# Altium PCB BoomClock.PcbDoc
Units mil, origin at the board's own origin, x right, y up, seen from the top; angles counter-clockwise.
Board outline 3917.32 x 3031.5 mil, 2 copper layers (Top Layer, Bottom Layer); 36 components, 55 nets, 205 pads, 32 vias.
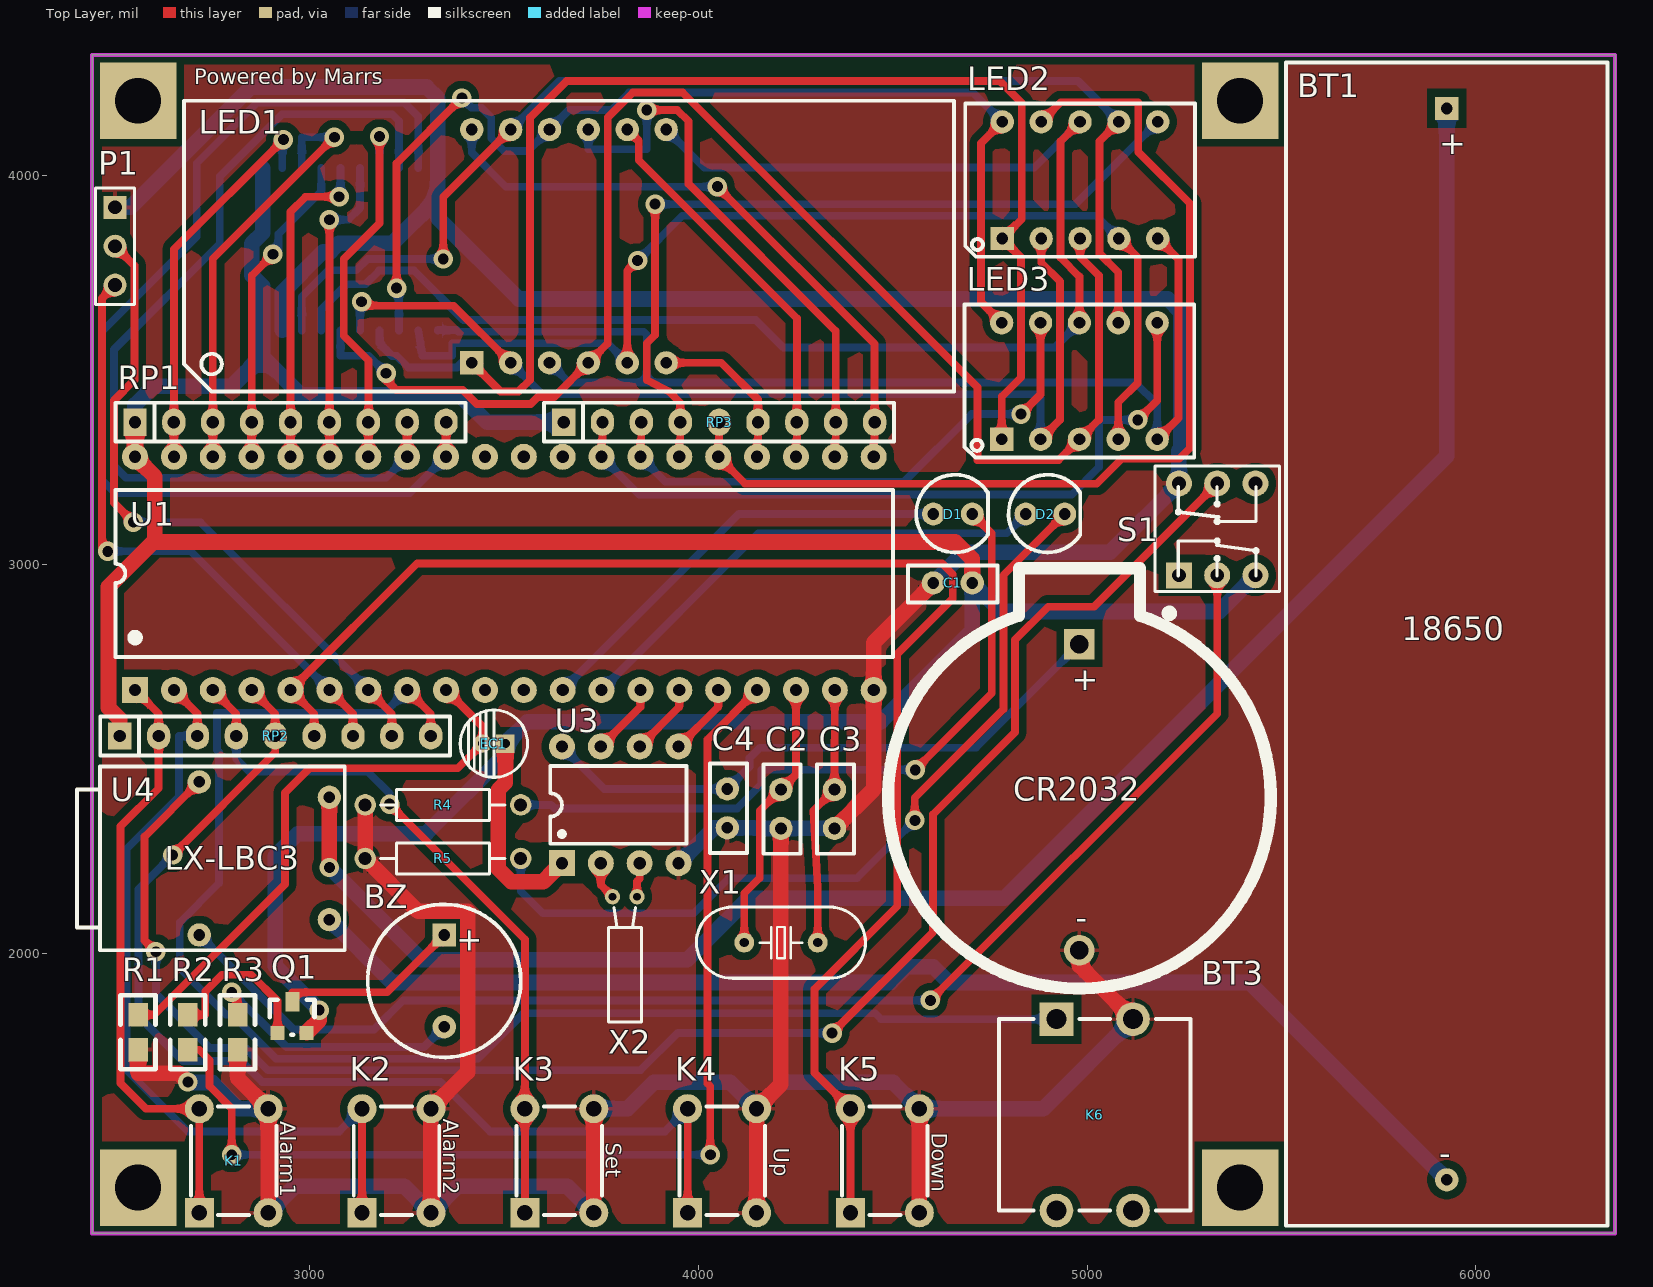
[diagram p0: Top Layer view]
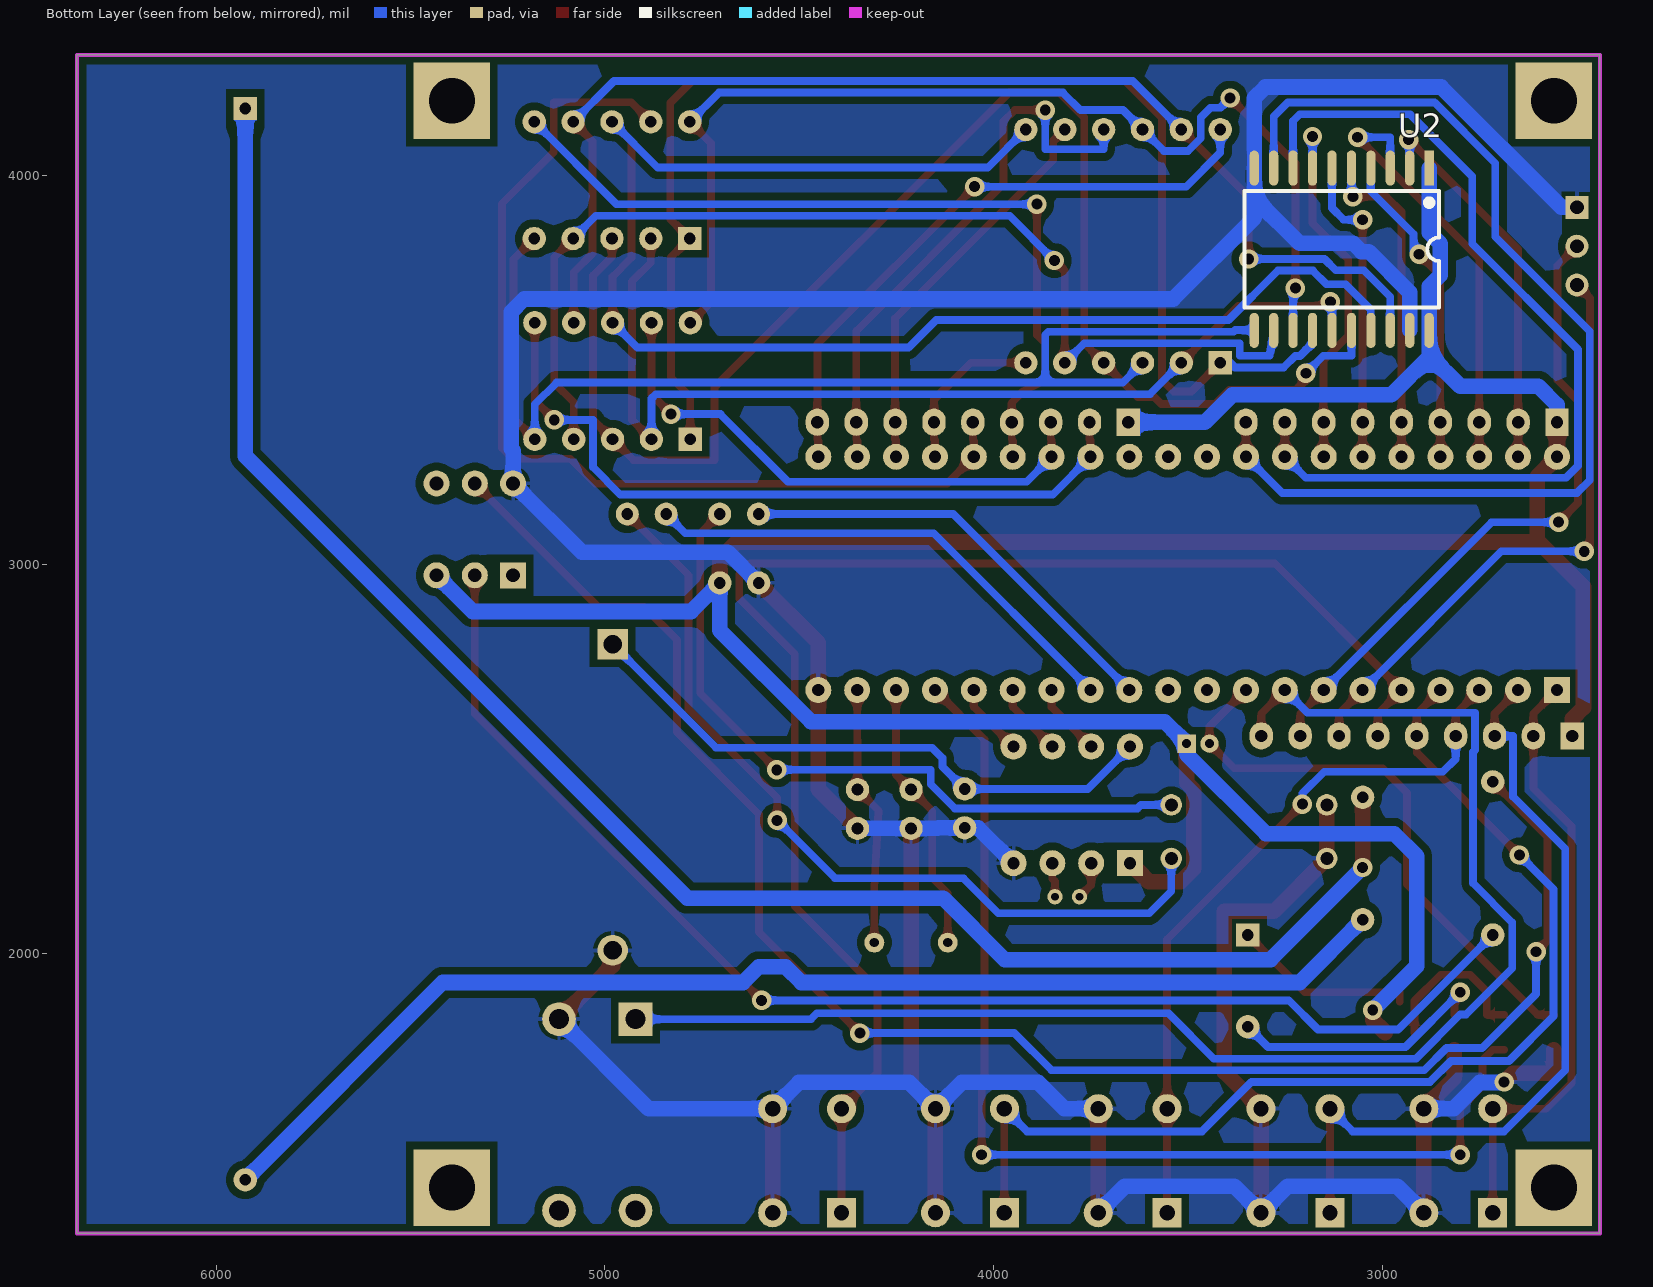
[diagram p1: Bottom Layer view, seen from below]
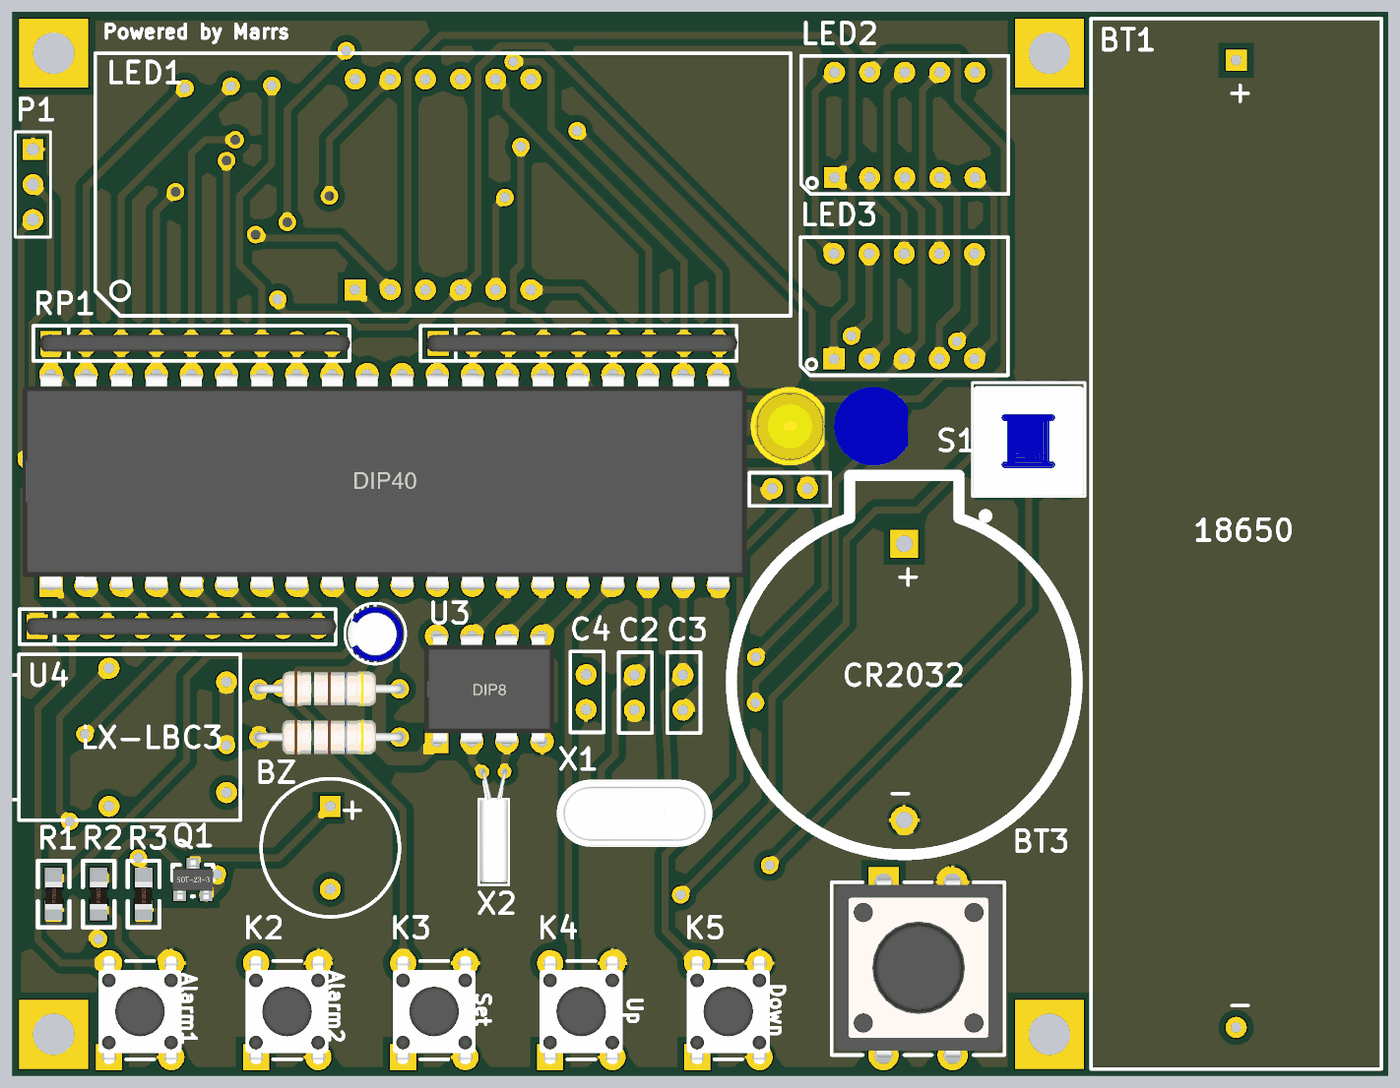
[diagram p2: 3D render of the assembled board from above, using the file's embedded part models]

## Layer stack, top to bottom
Top Solder: solder mask 0.4, Solder Resist, Dk 3.5
Top Layer: signal copper 1.4
Dielectric 1: dielectric 12.6, FR-4, Dk 4.8
Bottom Layer: signal copper 1.4
Bottom Solder: solder mask 0.4, Solder Resist, Dk 3.5

## Board outline
2440.94,1279.53 2440.94,4311.02 6358.27,4311.02 6358.27,1279.53

## Design rules (kind name [scope] priority, off if disabled: settings)
Clearance Clearance_Polygon_Pour [InPolygon] p1: gap=20 ignorepadtopadclearanceinfootprint=FALSE
Clearance [All] p2: gap=10 ignorepadtopadclearanceinfootprint=FALSE
PolygonConnect [All] p1: connectstyle=Relief reliefconductorwidth=10 reliefentries=4 polygonreliefangle="90 Angle" airgapwidth=10
RoutingVias [All] p1: holewidth=28 width=50 viastyle="Through Hole" minholewidth=28 minwidth=50 maxholewidth=28 maxwidth=50
SolderMaskExpansion [All] p1: expansion=4 istentingtop=FALSE
SupplyNets "Schematic Supply Nets_1" [InNet('GND')] p1: voltage=0.000
SupplyNets "Schematic Supply Nets" [InNet('VCC')] p2: voltage=0.000
Width Width_NetS1_6 [InNet('NetS1_6')] p1: maxlimit=80 minlimit=30 preferedwidth=40 minimp=50.000000 maximp=50.000000 favimp=50.000000
Width Width_NetS1_1 [InNet('NetS1_1')] p2: maxlimit=80 minlimit=30 preferedwidth=40 minimp=50.000000 maximp=50.000000 favimp=50.000000
Width Width_NETBT12 [InNet('NetBT1_2')] p3: maxlimit=80 minlimit=30 preferedwidth=40 minimp=50.000000 maximp=50.000000 favimp=50.000000
Width Width_NETBT11 [InNet('NetBT1_1')] p4: maxlimit=80 minlimit=30 preferedwidth=40 minimp=50.000000 maximp=50.000000 favimp=50.000000
Width Width_GND [InNet('GND')] p5: maxlimit=80 minlimit=30 preferedwidth=40 minimp=50.000000 maximp=50.000000 favimp=50.000000
Width Width_VCC [InNet('VCC')] p6: maxlimit=80 minlimit=30 preferedwidth=40 minimp=50.000000 maximp=50.000000 favimp=50.000000
Width [All] p7: maxlimit=40 minlimit=20 preferedwidth=20 minimp=50.000000 maximp=50.000000 favimp=50.000000
30 further rules are at their usual default settings.

## Components (designator, comment, footprint, x,y, rotation, side; value= is the part's Value field where it differs from the comment)
BT1 "18650" Battery_18650 5511.81,4291.34 r0 top
BT3 "Battery" Battery_CR2032 4980.31,2795.28 r270 top
BZ "Beep" Beep 3346.46,1929.13 r270 top
C1 "104" RAD-0.1 4539.72,2997.76 r0 top
C2 "33p" RAD-0.1 4167.6,2256.26 r90 top
C3 "33p" RAD-0.1 4305.39,2256.26 r90 top
C4 "104" RAD-0.1 4029.8,2257.83 r90 top
D1 "LED" LED5-YEL 4604.72,3129.92 r0 top
D2 "LED" LED5-BLUE 4842.52,3129.92 r0 top
EC1 "10uf" DIP-EC1.5X4X8 3503.94,2539.37 r180 top
K1 "Alarm1" DIP-6X6X5 2716.54,1332.68 r90 top
K2 "Alarm2" DIP-6X6X5 3135.23,1332.68 r90 top
K3 "Set" DIP-6X6X5 3553.93,1332.68 r90 top
K4 "Up" DIP-6X6X5 3972.63,1332.68 r90 top
K5 "Down" DIP-6X6X5 4391.33,1332.68 r90 top
K6 "Boom" DIP-12X12X8 4921.26,1830.71 r0 top
LED1 "Digital_4_time" Digital_4_time 2677.17,4192.91 r0 top
LED2 "Digital_2" Digital_2 4686.61,4185.43 r0 top
LED3 "Digital_2" Digital_2 4685.04,3668.9 r0 top
P1 "Header 3" HDR1X3 2500,3918.9 r270 top
Q1 "PNP" SOT-23 2952.76,1830.71 r0 top
R1 "10k" 0805R 2559.06,1751.97 r90 top
R2 "100" 0805R 2687.01,1751.97 r90 top
R3 "100" 0805R 2814.96,1751.97 r90 top
R4 "470" AXIAL0.4 3673.31,2421.89 r180 top
R5 "470" AXIAL0.4 3673.31,2284.09 r180 top
RP1 "RES_PACK9" A09R 2551.18,3366.14 r90 top
RP2 "RES_PACK9" A09R 2511.81,2559.06 r90 top
RP3 "RES_PACK9" A09R 3653.54,3366.14 r90 top
S1 "KFT DIP-8X8" "KFT DIP-8X8" 5236.22,2972.44 r90 top
U1 "STC89C51RC" DIP40 3501.18,2977.17 r90 top
U2 "74HC245D" SOP20 2879.92,4019.68 r270 bottom
U3 "DS1302" DIP8 3799.21,2381.89 r90 top
U4 "LX-LBC3" LX-LBC3 2460.63,2007.87 r90 top
X1 "XTAL-2P" "OSC HC-49S" 4212.6,2027.56 r180 top
X2 "32.768" OSC-2x6-WI-A 3842.52,2145.67 r180 top

## Footprints (in the part's own frame and the unit in brackets; to place one, negate y for a bottom-side part, rotate by r counter-clockwise, add the part's x,y. Pads: shape width x height; smd on the part's side, far side on the other; paste and mask are expansions set on the pad)
0805R [mil]
  rect 60x50 smd: 1(0,0) 2(90,0)
  silkscreen extent -50,-45 140,45, body extent 1,-25 80,25, height 15
A09R [mil]
  rect 70x60 hole 32: 1(0,0)
  oval 70x60 hole 32: 2(0,-100) 3(0,-200) 4(0,-300) 5(0,-400) 6(0,-500) 7(0,-600) 8(0,-700) 9(0,-800)
  silkscreen extent -50,-850 50,50, body extent -24,-853 25,33, height 169
AXIAL0.4 [mm] "1/4W/1/2W"
  round 1.4 hole 0.85: 1(3.302,1.016) 2(13.462,1.016)
  silkscreen extent 4.32,0 12.45,2.03, body extent 3,-0.24 13.76,2.28, height 2.63
Battery_18650 [mil]
  rect 60x60 hole 30: 1(413.38,-118.11)
  round 60 hole 30: 2(413.38,-2874.02)
  silkscreen extent 0,-2992 827,0
Battery_CR2032 [mm]
  rect 2x2 hole 1.2: 1(0,0)
  round 2 hole 1.2: 2(20,0)
  silkscreen extent -4.95,-12.5 22.5,12.5, body extent -4.95,-13 23,13, height 1.27
Beep [mil]
  rect 60x60 hole 30: 1(-118.11,0)
  round 60 hole 30: 2(118.11,0)
  silkscreen extent -197,-197 197,197
Digital_2 [mil]
  rect 60x60 hole 30: 1(95.28,-346.85)
  round 60 hole 30: 2(195.28,-346.85) 3(295.28,-346.85) 4(395.28,-346.85) 5(495.28,-346.85) 6(495.28,-46.85) 7(395.28,-46.85) 8(295.28,-46.85) 9(195.28,-46.85) 10(95.28,-46.85)
  silkscreen extent 0,-394 591,0
Digital_4_time [mil]
  rect 60x60 hole 30: 1(740.16,-674.02)
  round 60 hole 30: 2(840.16,-674.02) 3(940.16,-674.02) 4(1040.16,-674.02) 5(1140.16,-674.02) 6(1240.16,-674.02) 7(1240.16,-74.02) 8(1140.16,-74.02) 9(1040.16,-74.02) 10(940.16,-74.02) 11(840.16,-74.02) 12(740.16,-74.02)
  silkscreen extent 0,-748 1980,0
DIP8 [mm]
  rect 1.7x1.7 hole 0.8: 1(-3.81,3.81)
  round 1.7 hole 0.8: 2(-3.81,1.27) 3(-3.81,-1.27) 4(-3.81,-3.81) 5(3.81,-3.81) 6(3.81,-1.27) 7(3.81,1.27) 8(3.81,3.81)
  silkscreen extent -2.54,-4.32 2.54,4.57, body extent -3.94,-4.7 3.91,4.7, height 4.5
DIP40 [mm]
  rect 1.7x1.7 hole 0.8: 1(-7.62,24.13)
  round 1.7 hole 0.8: 2(-7.62,21.59) 3(-7.62,19.05) 4(-7.62,16.51) 5(-7.62,13.97) 6(-7.62,11.43) 7(-7.62,8.89) 8(-7.62,6.35) 9(-7.62,3.81) 10(-7.62,1.27) 11(-7.62,-1.27) 12(-7.62,-3.81) 13(-7.62,-6.35) 14(-7.62,-8.89) 15(-7.62,-11.43) 16(-7.62,-13.97) 17(-7.62,-16.51) 18(-7.62,-19.05) 19(-7.62,-21.59) 20(-7.62,-24.13) 21(7.62,-24.13) 22(7.62,-21.59) 23(7.62,-19.05) 24(7.62,-16.51) 25(7.62,-13.97) 26(7.62,-11.43) 27(7.62,-8.89) 28(7.62,-6.35) 29(7.62,-3.81) 30(7.62,-1.27) 31(7.62,1.27) 32(7.62,3.81) 33(7.62,6.35) 34(7.62,8.89) 35(7.62,11.43) 36(7.62,13.97) 37(7.62,16.51) 38(7.62,19.05) 39(7.62,21.59) 40(7.62,24.13)
  silkscreen extent -5.46,-25.4 5.46,25.4, body extent -7.91,-26.19 7.65,26.16, height 4.7
DIP-6X6X5 [mm]
  rect 1.9x1.9 hole 1: 1(0,0)
  round 1.9 hole 1: 2(0,-4.5) 3(6.8,-4.5) 4(6.8,0)
  silkscreen extent -0.16,-5.04 6.96,0.54, body extent -0.8,-5.24 7.41,0.76, height 4.95
DIP-12X12X8 [mm]
  rect 2.2x2.2 hole 1.3: 1(0,0)
  round 2.2 hole 1.3: 2(5,0) 3(0,-12.5) 4(5,-12.5)
  silkscreen extent -3.75,-12.5 8.75,0, body extent -3.46,-13.08 8.54,0.72, height 8.15
DIP-EC1.5X4X8 [mm]
  rect 1.2x1.2 hole 0.6: 1(0,0)
  round 1.2 hole 0.6: 2(1.5,0)
  silkscreen extent -1.45,-2.2 2.95,2.2, body extent -1.26,-1.97 2.76,2.03, height 8.04
HDR1X3 [mm] "Connector; Header; 3 Position"
  rect 1.5x1.5 hole 0.9: 1(0,0)
  round 1.5 hole 0.9: 2(2.54,0) 3(5.08,0)
  silkscreen extent -1.27,-1.27 6.35,1.27
"KFT DIP-8X8" [mm]
  rect 1.7x1.7 hole 0.9: 1(0,0)
  round 1.7 hole 0.9: 2(0,-2.5) 3(0,-5) 4(6,0) 5(6,-2.5) 6(6,-5)
  silkscreen extent -2.69,-6.56 7.15,1.56, body extent -1.08,-6.48 6.92,1.52, height 13.1
LED5-BLUE [mm]
  round 1.5 hole 0.762: A(0,0) K(2.54,0)
  silkscreen extent -1.12,-2.51 3.56,2.57, body extent -1.58,-2.85 3.77,2.85, height 8.6
LED5-YEL [mm]
  round 1.5 hole 0.762: A(0,0) K(2.54,0)
  silkscreen extent -1.12,-2.51 3.56,2.57, body extent -1.58,-2.85 3.77,2.85, height 8.6
LX-LBC3 [mil]
  round 60 hole 30: 1(39.37,-255.91) 2(433.07,-255.91) 3(393.7,-590.55) 4(78.74,-590.55)
  silkscreen extent 0,-630 472,59
"OSC HC-49S" [mm]
  round 1.3 hole 0.6: 1(-2.4,0) 2(2.4,0)
  silkscreen extent -5.52,-2.32 5.52,2.33, body extent -5.53,-2.29 5.53,2.36, height 4.13
OSC-2x6-WI-A [mm]
  round 1 hole 0.5: 1(0,0) 2(1.6,0)
  silkscreen extent -0.3,0.7 1.87,8.2, body extent -0.25,-0.14 1.75,8.02, height 2.05
RAD-0.1 [mil]
  round 60 hole 30: 1(65,-45) 2(165,-45)
  silkscreen extent 0,-95 230,0
SOP20 [mm]
  rect 2.3x0.6 smd: 1(0,0)
  oval 2.3x0.6 smd: 2(0,-1.27) 3(0,-2.54) 4(0,-3.81) 5(0,-5.08) 6(0,-6.35) 7(0,-7.62) 8(0,-8.89) 9(0,-10.16) 10(0,-11.43) 11(10.6,-11.43) 12(10.6,-10.16) 13(10.6,-8.89) 14(10.6,-7.62) 15(10.6,-6.35) 16(10.6,-5.08) 17(10.6,-3.81) 18(10.6,-2.54) 19(10.6,-1.27) 20(10.6,0)
  silkscreen extent 1.49,-12.07 9.11,0.63, body extent 0.13,-12.07 10.44,0.63, height 2.7
SOT-23 [mil]
  rect 36x36 smd: B(-35,-35) E(40,-35)
  rect 36x50 smd: C(3,45)
  silkscreen extent -55,-40 60,50, body extent -54,-48 60,62, height 47

## Part data
BT1: library part Battery, "电池"
BT3: "电池"
BZ: "蜂鸣器"
C1 C2 C3 C4: library part CAP, "无极性电容"
EC1: library part DIP_ECAP, "直插电解电容"
K1 K2 K3 K4 K5 K6: library part KEY, "按动开关"
LED1: "四位时间数码管"
LED2 LED3: "二位数码管"
P1: "Header, 3-Pin", LatestRevisionDate=17-Jul-2002, LatestRevisionNote="Re-released for DXP Platform.", Publisher="Altium Limited"
Q1: "PNP三极管"
R1 R2 R3 R4 R5: library part RES, "电阻"
RP1 RP2 RP3: "排阻"
U4: "电源模块"
X1: "2脚无源脚晶振"
X2: library part XTAL-2P, "2脚无源脚晶振"

## Free pads (board coordinates)
  rect 196.85x196.85 hole 118.11: 1(2559.06,1397.64) 2(5393.7,1397.64) 3(5393.7,4192.91) 4(2559.06,4192.91)

## Via types
v1: diameter 50, hole 28, Top Layer to Bottom Layer, 32 vias

## Nets (pads, with @x,y where several pads share a name; then routed paths per layer and width w, separated by ;. In a path a pad name is that pad's centre, name@x,y a point inside that pad or via, vN(x,y) a via of type N, cw(c..) or ccw(c..) an arc to the next point about the centre after c; other vN are vias at no path point)
A0: RP1.2 U1.39 U2.2 | length 1007.2
  Top Layer w20: U1.39 RP1.2 2651.18,3811.18 v1(2933,4093)
  Bottom Layer w20: U2.2 2929.92,4089.92 v1(2933,4093)
A1: RP1.3 U1.38 U2.3 | length 1114.8
  Top Layer w20: U1.38 RP1.3 2751.18,3786.18 v1(3064,4099)
  Bottom Layer w20: U2.3 2979.92,4099 v1(3064,4099)
A2: RP1.4 U1.37 U2.4 | length 816.6
  Top Layer w20: U1.37 RP1.4 2851.18,3743.18 v1(2906,3798)
  Bottom Layer w20: v1(2906,3798) 2920,3812 2920,3850 3029.92,3959.92 U2.4
A3: RP1.5 U1.36 U2.5 | length 846.2
  Top Layer w20: U1.36 RP1.5 2951.18,3907.18 2990,3946 v1(3076,3946)
  Bottom Layer w20: v1(3076,3946) 3079.92,3949.92 U2.5
A4: RP1.6 U1.35 U2.6 | length 803.7
  Top Layer w20: U1.35 RP1.6 v1(3051.18,3887)
  Bottom Layer w20: v1(3051.18,3887) 3100,3887 3129.92,3916.92 U2.6
A5: RP1.7 U1.34 U2.7 | length 970.5
  Top Layer w20: U1.34 RP1.7 3152,3366.14 3152,3524.58 3088.11,3588.47 3088.11,3786.11 3180,3878 v1(3180,4101)
  Bottom Layer w20: U2.7 3180,4053.08 v1(3180,4101)
A6: RP1.8 U1.33 U2.8 | length 2391
  Top Layer w20: U1.33 RP1.8
  Bottom Layer w20: U2.8 3229.92,4141.08 3212.65,4158.35 2929.35,4158.35 2769,3998 2769,3825 2497,3553 2497,3254 2528,3223 3197.02,3223 U1.33
A7: RP1.9 U1.32 U2.9 | length 2723.6
  Top Layer w20: U1.32 RP1.9
  Bottom Layer w20: U2.9 3279.92,4152.33 3243.9,4188.35 2865.92,4188.35 2709.92,4032.35 2709.92,3842.92 2467,3600 2467,3217 2500,3184 3258.02,3184 U1.32
Alarm1: D1.A U1.12 | length 1141.1
  Bottom Layer w20: U1.12 4103.94,3129.92 D1.A
Alarm2: D2.A U1.13 | length 1278.9
  Bottom Layer w20: U1.13 4154.41,3080.39 4792.99,3080.39 D2.A
B0: LED1.11 LED2.7 LED3.7 U2.18 | length 3112.8
  Top Layer w20: v1(3344,3786) 3344,3945.58 LED1.11 ; LED3.7 5080.32,3751.57 5031.89,3800 5031.89,4088.58 LED2.7
  Bottom Layer w20: U2.18 2979.92,3688.92 3048,3757 3119.98,3757 3148.98,3786 v1(3344,3786) ; LED1.11 3642.32,4243.9 4976.57,4243.9 LED2.7
B1: LED1.7 LED2.8 LED3.8 U2.17 | length 3865.1
  Top Layer w20: LED3.8 4980.32,3740.57 4931.89,3789 4931.89,4088.58 LED2.8
  Bottom Layer w20: U2.17 3029.92,3655.92 3095,3721 3144,3721 3179,3756 3268.98,3756 3395.98,3629 4148,3629 4219,3558 4916.27,3558 LED3.8 ; LED1.7 4015.22,4021 4864.31,4021 LED2.8
B2: LED1.4 LED2.3 LED3.3 U2.16 | length 3780.8
  Top Layer w20: v1(3197,3492) 3197,3475 3223,3449 3394,3449 3430,3413 3569,3413 3587,3431 3629.42,3431 LED1.4 3767.32,3568.9 3767.32,4150 3831.22,4213.9 3960.04,4213.9 4718,3455.93 4718,3268 4926.27,3268 LED3.3 5030.32,3372.05 5030.32,3743.59 4981.89,3792.01 LED2.3
  Bottom Layer w20: U2.16 3079.92,3537 3152,3537 v1(3197,3492)
B3: LED1.2 LED2.2 LED3.2 U2.15 | length 2587.1
  Top Layer w20: v1(3134,3676) 3144.3,3665.7 3370.52,3665.7 LED1.2 ; LED3.2 4930.32,3372.05 4930.32,3728.27 4881.89,3776.69 LED2.2
  Bottom Layer w20: U2.15 3129.92,3671.92 v1(3134,3676) ; LED1.2 3598.22,3438 4869.36,3438 4880.32,3427.05 LED3.2
B4: LED1.1 LED2.1 LED3.1 U2.14 | length 3422.9
  Top Layer w20: LED1.1 3491.22,3445 3537.32,3445 3567.32,3475 3567.32,4150 3661.22,4243.9 4775.1,4243.9 4831.89,4187.11 4831.89,3888.58 LED2.1 4830.32,3790.16 4830.32,3482 4780.32,3432 LED3.1
  Bottom Layer w20: U2.14 3179.92,3569 3212.36,3536.56 3224.34,3536.56 3253.81,3507.09 3379.92,3507.09 3391.73,3518.9 LED1.1
B5: LED1.10 LED2.10 LED3.10 U2.13 | length 2801.8
  Top Layer w20: v1(3224,3711) 3224,4032 v1(3392,4200) ; LED3.10 4727,3675.36 4727,4083.69 LED2.10
  Bottom Layer w20: v1(3224,3711) 3229.92,3705.08 U2.13 ; v1(3392,4200) 3417,4175 3442.32,4175 3467.32,4150 3467.32,4096.68 3500,4064 3562.42,4064 LED1.10 3667.42,4169 3777.1,4169 3822,4213.9 4706.57,4213.9 LED2.10
B6: LED1.5 LED2.4 LED3.4 U2.12 | length 2786.5
  Top Layer w20: LED1.5 3817.32,3755.32 v1(3844,3782) ; LED3.4 5080.32,3417.05 5130.32,3467.05 5130.32,3790.16 LED2.4
  Bottom Layer w20: U2.12 3290.84,3537.09 3367,3537.09 3367,3569 3767.22,3569 LED1.5 ; v1(3844,3782) 3959,3897 5023.47,3897 LED2.4
B7: LED1.3 LED2.5 LED3.5 U2.11 | length 2924.4
  Top Layer w20: LED3.5 5235,3376.73 5235,3785.47 LED2.5
  Bottom Layer w20: U2.11 3329.92,3603 3379,3603 3383,3599 3859.32,3599 3867.32,3591 3867.32,3468 ; LED1.3 3668.22,3468 3867.32,3468 ; LED3.5 5180.32,3412.05 5124.36,3468 3867.32,3468
Beep: R2.1 U1.17 | length 2815.5
  Top Layer w20: R2.1 2716.03,1751.97 2743,1725 2743,1658 2800,1601 v1(2800,1482) ; v1(4031,1482) 4031,1658 4024,1665 4024,2549.98 U1.17
  Bottom Layer w20: v1(2800,1482) v1(4031,1482)
Boom: K6.1 RP2.9 U1.8 | length 3764.2
  Top Layer w20: U1.8 3311.81,2616.54 RP2.9
  Bottom Layer w20: U1.8 3193.02,2619 2761.81,2619 2761.81,2523 2767,2517.81 2767,2180 2666,2079 2666,1962 2785,1843 2799.8,1843 2913.7,1729.1 3433.63,1729.1 3550.53,1846 4455,1846 4470.29,1830.71 K6.1
DIG1: LED1.12 RP3.9 U1.21 | length 1590.6
  Top Layer w20: v1(4049,3972) 4453.54,3567.46 RP3.9 4453.54,3322.36 4451.18,3320 U1.21
  Bottom Layer w20: LED1.12 3417.32,4059.68 3505,3972 v1(4049,3972)
DIG2: LED1.9 RP3.8 U1.22 | length 1442.1
  Top Layer w20: v1(3867.32,4168.9) 3946.1,4168.9 3975,4140 3975,3979 4353.54,3600.46 RP3.8 4353.54,3322.36 4351.18,3320 U1.22
  Bottom Layer w20: LED1.9 3717.32,4068 3867.32,4068 v1(3867.32,4168.9)
DIG3: LED1.8 RP3.7 U1.23 | length 1023.4
  Top Layer w20: LED1.8 3847,4089.22 3847,4040 4253.54,3633.46 RP3.7 4253.54,3322.36 4251.18,3320 U1.23
DIG4: LED1.6 RP3.6 U1.24 | length 423.6
  Top Layer w20: LED1.6 4059.1,3518.9 4153.54,3424.46 RP3.6 4153.54,3322.36 4151.18,3320 U1.24
DIG5: LED2.9 RP3.5 U1.25 | length 2585.5
  Top Layer w20: RP3.5 4053.54,3322.36 4051.18,3320 U1.25 4120.35,3208 5025,3208 5089,3272 5237,3272 5265,3300 5265,3928 5131.89,4061.11 5131.89,4189 4932.31,4189 LED2.9
DIG6: LED2.6 RP3.4 U1.26 | length 2087.2
  Top Layer w20: v1(3889,3927) 3889,3590.68 3867.32,3569 3867.32,3475 3925,3445 3953.54,3416.46 RP3.4 3953.54,3322.36 3951.18,3320 U1.26
  Bottom Layer w20: v1(3889,3927) 4970.31,3927 LED2.6
DIG7: LED3.9 RP3.3 U1.27 | length 1423.3
  Top Layer w20: U1.27 3851.18,3320 3853.54,3322.36 RP3.3 ; v1(4830,3387) 4880.32,3437.32 LED3.9
  Bottom Layer w20: U1.27 3915.35,3213 4529,3213 4703,3387 v1(4830,3387)
DIG8: LED3.6 RP3.2 U1.28 | length 1931.1
  Top Layer w20: U1.28 3751.18,3320 3753.54,3322.36 RP3.2 ; v1(5130.36,3372.05) 5180.32,3422 LED3.6
  Bottom Layer w20: U1.28 3848.35,3180 4960.32,3180 5030.32,3250 5030.32,3372.05 v1(5130.36,3372.05)
GND: BT3.2 C1.1 C2.1 C3.1 C4.1 K1.2 K1.3 K2.2 K2.3 K3.2 K3.3 K4.2 K4.3 K5.2 K5.3 K6.2 P1.1 R1.1 R3.1 R4.2 R5.2 S1.4 U1.20 U2.10 U2.19 U3.4 | length 12731.3
  Top Layer w40: R1.1 2559.06,1691 2665,1691 v1(2687,1669) ; R3.1 2814.96,1679.13 K1.3 K1.2 ; R4.2 R5.2 3279.4,2108 3406.46,2108 3406.46,1694.45 K2.3 K2.2 ; K3.2 K3.3 ; K4.2 K4.3 4212.6,1663.2 C2.1 ; C3.1 4451.18,2422.05 U1.20 4451.18,2799.21 C1.1 ; K5.2 K5.3 ; BT3.2 4980.32,1968.5 K6.2
  Bottom Layer w40: P1.1 2539.9,3918.9 2849.35,4228.35 3301.24,4228.35 3329.92,4199.67 U2.10 3329.92,3943 ; v1(2687,1669) 2687,1667.8 2750,1667.8 2817.4,1600.39 K1.3 ; K1.2 2962.02,1401 3244.08,1401 K2.2 3380.72,1401 3662.77,1401 K3.2 ; U2.19 2929.92,3700 3034.96,3805.04 3054,3805.04 3074.96,3826 3212.92,3826 3329.92,3943 ; K3.3 3818,1600.39 3885.61,1668 4082.19,1668 K4.3 4217.4,1668 4500.89,1668 K5.3 4887.8,1600.39 K6.2 ; U3.4 4040.16,2322.83 C4.1 4142,2322.83 4143.57,2321.26 C2.1 C3.1 ; C1.1 4683.64,3031.67 5059.23,3031.67 S1.4 5236.22,3293.22 5241,3298 5241,3650 5208,3683 3538.52,3683 3329.92,3891.6 3329.92,3943
K1: K1.1 K1.4 RP2.2 U1.1 | length 1574.2
  Top Layer w20: U1.1 2611.81,2616.54 RP2.2 2611.81,2424.89 2514,2327.08 2514,1666 2579.61,1600.39 K1.4 K1.1
K2: K2.1 K2.4 RP2.3 U1.2 | length 2068.7
  Top Layer w20: U1.2 2711.81,2616.54 RP2.3 ; K2.1 K2.4
  Bottom Layer w20: RP2.3 2664,2559.06 2664,2403 2530,2269 2530,1699.11 2687.11,1542 3076.84,1542 K2.4
K3: K3.1 K3.4 RP2.4 U1.3 | length 1855.8
  Top Layer w20: U1.3 2811.81,2616.54 RP2.4 ; v1(3206,2383.77) 3553.93,2035.84 K3.4 K3.1
  Bottom Layer w20: RP2.4 2811.81,2500 2844.81,2467 3150,2467 3206,2411 v1(3206,2383.77)
K4: K4.1 K4.4 RP2.5 U1.4 | length 2837.1
  Top Layer w20: v1(2648,2253) 2911.81,2516.81 RP2.5 2911.81,2616.54 U1.4 ; K4.1 K4.4
  Bottom Layer w20: v1(2648,2253) 2560,2165 2560,1838 2674.78,1723.22 2823.94,1723.22 2878.07,1669.1 3337.22,1669.1 3464.32,1542 3914.23,1542 K4.4
K5: K5.1 K5.4 RP2.6 U1.5 | length 3821.2
  Top Layer w20: RP2.6 3011.81,2616.54 U1.5 3277.02,3003 4626.72,3003 4654.72,2975 4654.72,2912.72 4512,2770 4512,2121 4299,1908 4299,1692.72 K5.4 K5.1
NetBT1_1: BT1.1 U4.3 | length 4583.4
  Top Layer w40: v1(3051.18,2220.82) U4.3
  Bottom Layer w40: v1(3051.18,2220.82) 3288,1984 3971.84,1984 4129.95,2142.11 4788.11,2142.11 5925.2,3279.2 BT1.1
NetBT1_2: BT1.2 U4.4 | length 3184.6
  Bottom Layer w40: U4.4 3212.8,1925 4494.57,1925 4534.79,1965.22 4604.57,1965.22 4644.79,1925 5417.52,1925 BT1.2
NetBT3_1: BT3.1 C4.2 U3.8 | length 1543.6
  Bottom Layer w20: U3.8 3758.27,2422.83 C4.2 4131.73,2479.76 4131.73,2502.13 4158.6,2529 4714.04,2529 BT3.1
NetBZ_1: BZ.1 Q1.C | length 476
  Top Layer w20: Q1.C 2955.76,1900 3199.21,1900 BZ.1
NetBZ_2: BZ.2 R3.2 | length 690.6
  Top Layer w20: v1(2800,1900) 2814.96,1885.04 R3.2
  Bottom Layer w20: v1(2800,1900) 2940.9,1759.1 3294.53,1759.1 BZ.2
NetD1_K: D1.K R4.1 | length 1841.4
  Top Layer w20: v1(4558,2472) 4754.72,2668.72 4754.72,3079.92 D1.K
  Bottom Layer w20: R4.1 3621.11,2381.89 3630.17,2372.83 4100,2372.83 4162,2434.83 4162,2472 v1(4558,2472)
NetD2_K: D2.K R5.1 | length 2168.2
  Top Layer w20: v1(4557,2342) 4557,2400 4784.72,2627.72 4784.72,2972.13 D2.K
  Bottom Layer w20: R5.1 3543.31,2159.69 3600,2103 3988,2103 4078,2193 4408,2193 v1(4557,2342)
NetQ1_B: Q1.B R2.2 | length 418.2
  Top Layer w20: R2.2 2732,1841.97 2732,1902 2775,1945 2850,1945 2917.76,1877.24 Q1.B
NetS1_2: S1.2 U4.1 | length 3411.3
  Top Layer w20: v1(4597,1879) 5334.65,2616.65 S1.2
  Bottom Layer w20: U4.1 2959.78,1804 3166,1804 3241,1879 v1(4597,1879)
NetS1_5: S1.5 U4.2 | length 4368.9
  Top Layer w20: v1(2605,2004) 2575.91,2033.09 2575.91,2300.32 U4.2 ; v1(4344,1795) 4604,2055 4604,2357.69 4814.72,2568.42 4814.72,2806.45 4900,2891.72 5017.71,2891.72 S1.5
  Bottom Layer w20: v1(2605,2004) 2605,1895.34 2743.86,1756.47 2835.26,1756.47 2892.64,1699.1 3851.1,1699.1 3947,1795 v1(4344,1795)
NetU3_2: U3.2 X2.2 | length 98.8
  Top Layer w20: U3.2 3749.21,2175.99 X2.2
NetU3_3: U3.3 X2.1 | length 89
  Top Layer w20: X2.1 3842.52,2185 3849.21,2191.69 U3.3
P3.4: U1.14 U3.7 | length 187.5
  Top Layer w20: U3.7 3851.18,2633.86 U1.14
P3.5: U1.15 U3.6 | length 187.5
  Top Layer w20: U3.6 3951.18,2633.86 U1.15
P3.6: U1.16 U3.5 | length 187.5
  Top Layer w20: U3.5 4051.18,2633.86 U1.16
RST: EC1.2 R1.2 U1.9 | length 1489
  Top Layer w20: R1.2 2601,1841.97 2937,2177.97 2937,2413 3000,2476 3381.51,2476 EC1.2 3444.88,2583.47 U1.9
Signal1: P1.3 RP2.7 U1.6 | length 1566.4
  Top Layer w20: v1(2481,3034) 2466,3049 2466,3684.9 P1.3 ; U1.6 3111.81,2616.54 RP2.7
  Bottom Layer w20: v1(2481,3034) 2694.35,3034 U1.6
Signal2: P1.2 RP2.8 U1.7 | length 1699.5
  Top Layer w20: P1.2 2550,3768.9 2550,3475 2497,3422 2497,3159 v1(2547,3109) ; U1.7 3211.81,2616.54 RP2.8
  Bottom Layer w20: v1(2547,3109) 2719.35,3109 U1.7
VCC: C1.2 EC1.1 Q1.E RP1.1 RP2.1 RP3.1 S1.3 U1.40 U2.1 U2.20 U3.1 | length 8921.9
  Top Layer w40: 2483,2938.82 2483,2632 2511.81,2603.19 RP2.1 ; 2483,2942.82 2598.18,3058 4661,3058 4704.72,3014.28 C1.2 ; RP1.1 U1.40 2602,3226.35 2602,3061.82 2601.01,3060.83 ; Q1.E 3025,1827.95 v1(3025,1854) ; EC1.1 3503.94,2439 3485,2420.06 3485,2218 3519.12,2183.88 3601.2,2183.88 U3.1
  Bottom Layer w40: RP1.1 2551.18,3410.6 2599.18,3458.6 2800,3458.6 2877.7,3536.3 ; U2.1 2879.92,3854 2851,3825.08 2851,3744.33 2879.92,3715.41 U2.20 ; v1(3025,1854) 2912,1967 2912,2250 2970,2308 3300,2308 3503.94,2511.94 EC1.1 3560.57,2596 4470,2596 4704.72,2830.72 C1.2 4778.2,2879.28 5339.91,2879.28 S1.3 ; RP3.1 3456.86,3366.14 3386.44,3436.56 2977.44,3436.56 2877.7,3536.3 ; 2877.7,3536.3 2879.92,3538.52 U2.20 ; 2877.7,3536.3 U2.20
XT1: C3.2 U1.19 X1.1 | length 672.8
  Top Layer w20: X1.1 4307.09,2167.91 4296,2366.87 C3.2 4350.39,2548 4351.18,2548.79 U1.19
XT2: C2.2 U1.18 X1.2 | length 704.7
  Top Layer w20: X1.2 4118.11,2154.11 4158,2194 4158,2366.66 C2.2 4251.18,2459.84 U1.18
pads on no net: K6.3 K6.4 S1.1 S1.6 U1.10 U1.11 U1.29 U1.30 U1.31

## Polygon pours and split planes (outlines as drawn)
GND on Top Layer "GND_L01_P000" (solid, pour order 0): 2440.94,4311.02 2440.94,1279.53 6358.27,1279.53 6358.27,4311.02
GND on Bottom Layer "GND_L02_P001" (solid, pour order 1): 2440.94,4311.02 2440.94,1279.53 6358.27,1279.53 6358.27,4311.02

## Keep-outs
Keep-Out Layer:
  the board outline again, w10

## Silkscreen, mask and mechanical layers (free items; w line width, h text height)
Top Overlay:
  text "Powered by Marrs" at 2703.51,4235.72 h39.37
  text "Alarm2" at 3343.82,1574.77 h39.37 r270
  text "Alarm1" at 2925.12,1568.21 h39.37 r270
  text "Down" at 4599.91,1538.69 h39.37 r270
  text "Set" at 3762.51,1512.45 h39.37 r270
  text "Up" at 4194.33,1499.33 h39.37 r270

## Text inside footprints (layer, text, board x,y; h text height)
BT1: Top Overlay "-" at 5905.2,1456.39 h60; Top Overlay "+" at 5905.2,4055.12 h60
BT3: Top Overlay "-" at 5000.31,2106.6 h60 r180; Top Overlay "+" at 4960.32,2677.17 h60; Top Overlay "CR2032" at 4810.37,2391.89 h60
BZ: Top Overlay "+" at 3385.83,2067.24 h60 r270